# Altium PCB WUT-YJ-4-3-1.PcbDoc (part 5 of 11)
Units mm, origin at the board's own origin, x right, y up, seen from the top; angles counter-clockwise.
Board outline 85 x 56 mm, 4 copper layers (Top Layer, GND_Plane, 3V3_Plane, Bottom Layer); 182 components, 321 nets, 1106 pads, 360 vias.
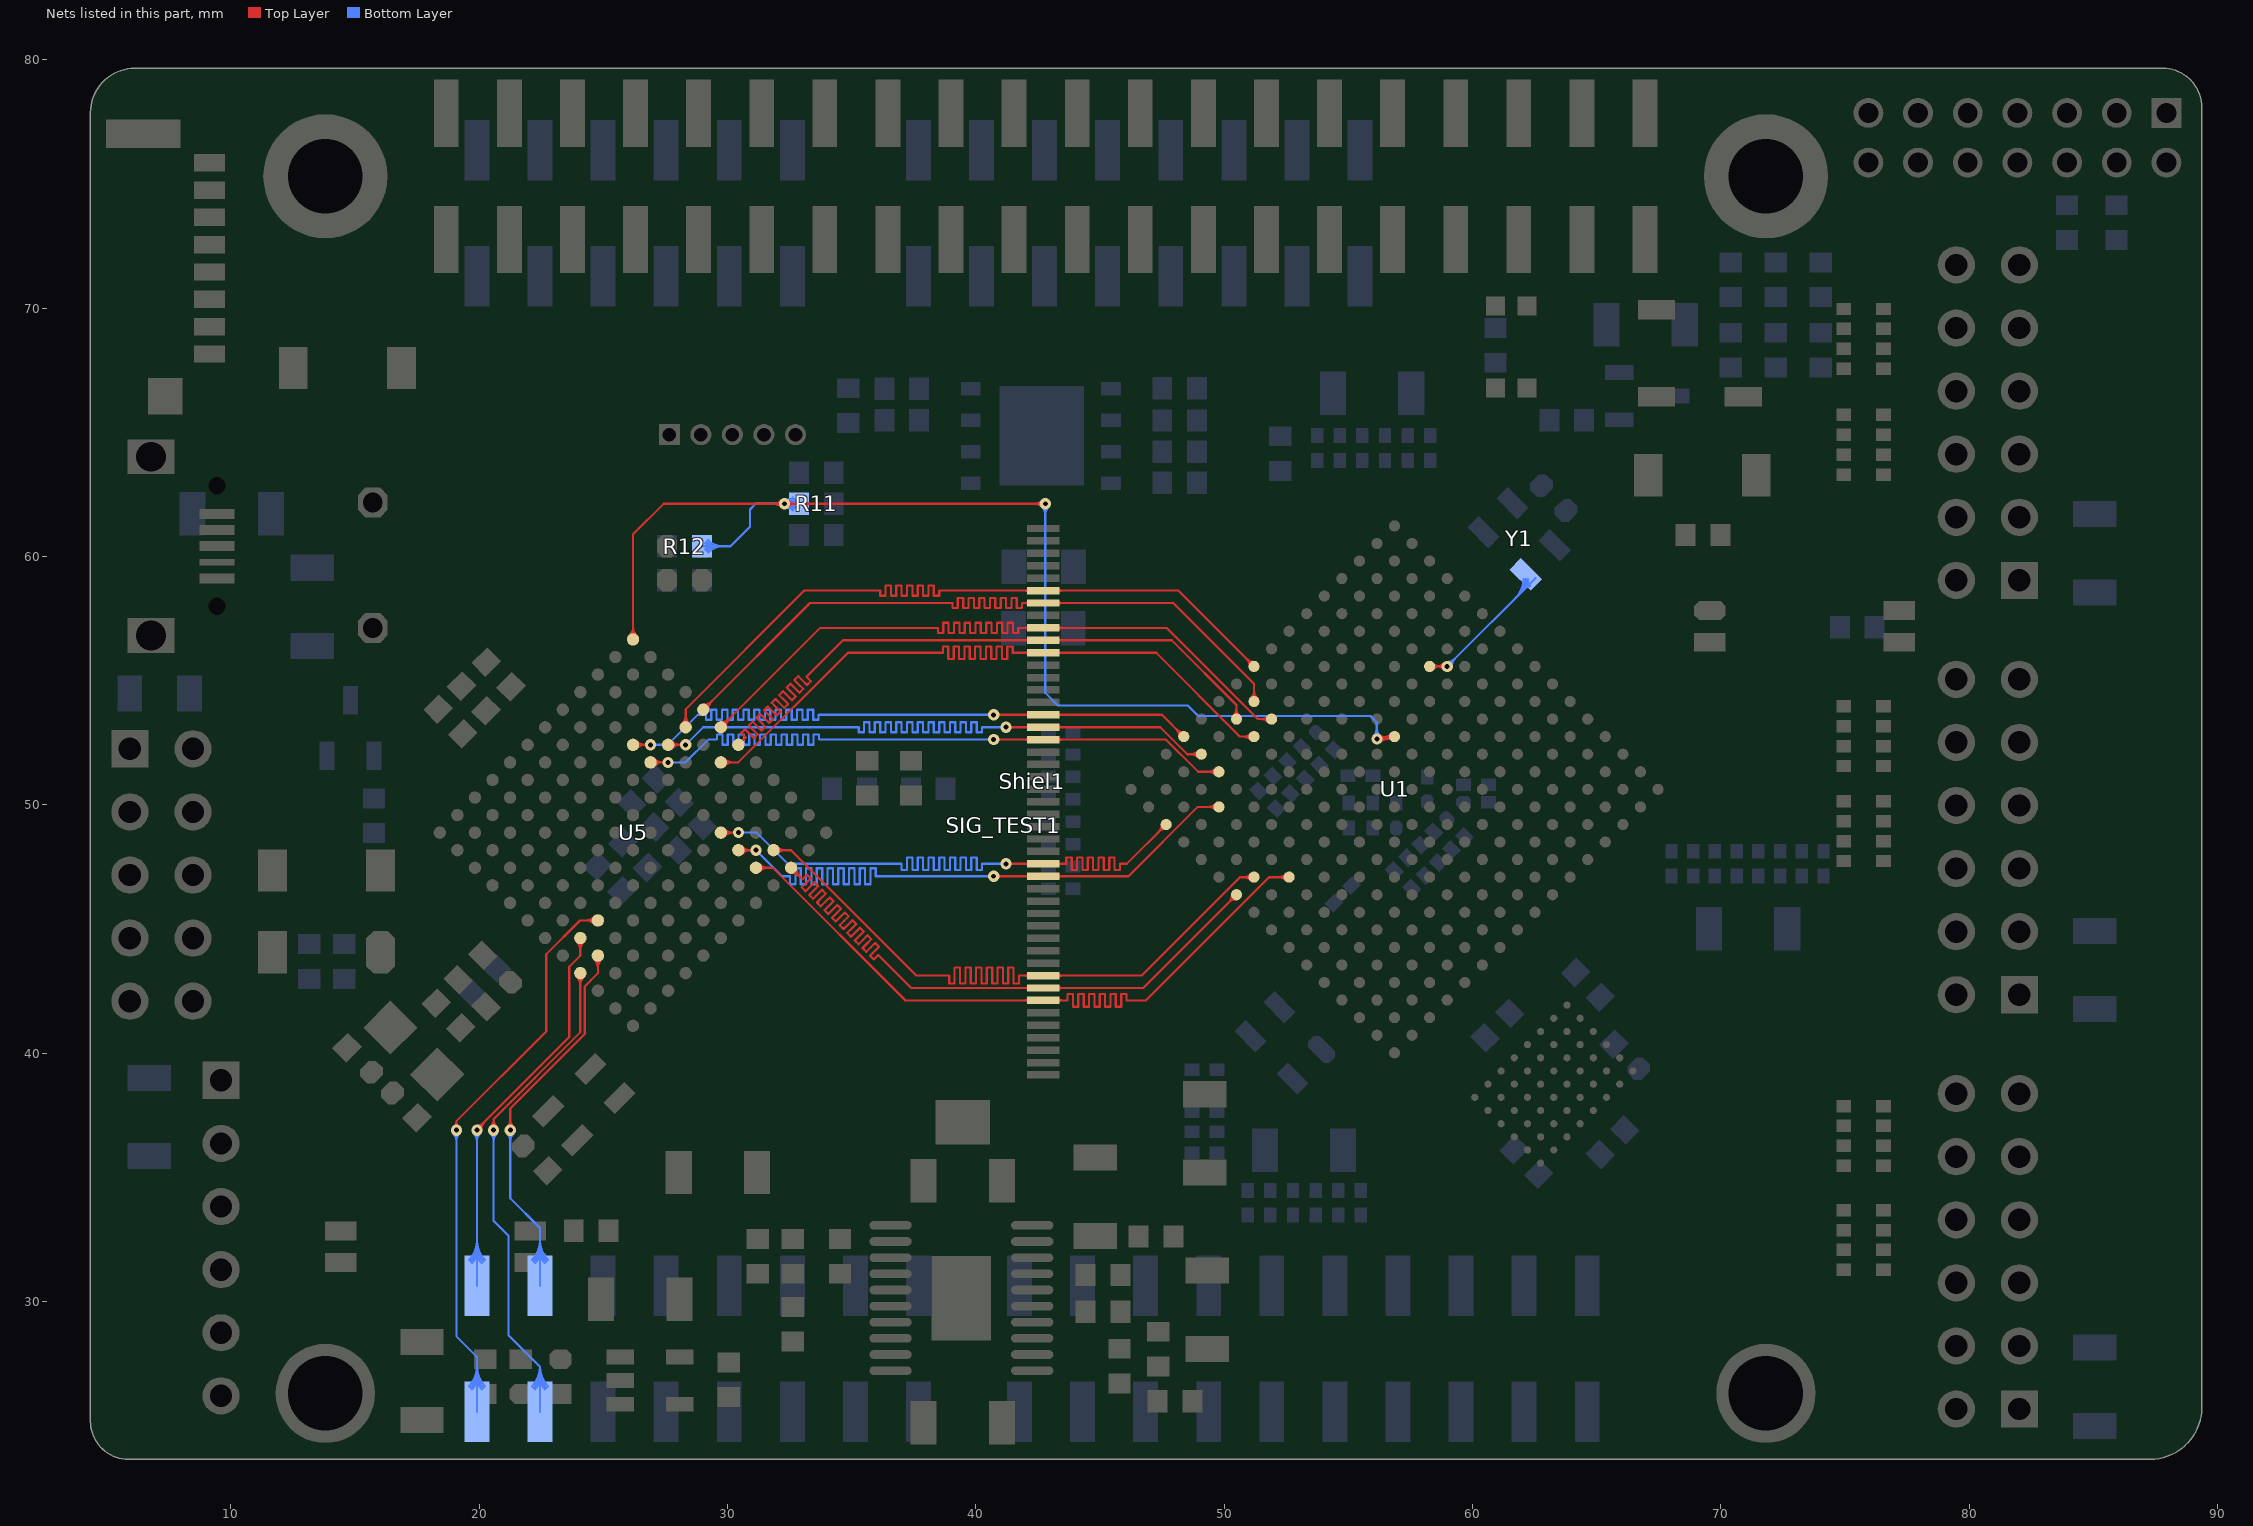
[diagram p7: the nets of this part, all layers, seen from the top]

## Via types
v1: diameter 0.45, hole 0.2, Top Layer to Bottom Layer, tented both sides, 280 vias
v2: diameter 0.61, hole 0.33, Top Layer to Bottom Layer, tented both sides, 40 vias
v3: diameter 0.403, hole 0.2, Top Layer to Bottom Layer, tented both sides, 15 vias
v4: diameter 0.5, hole 0.2, Top Layer to Bottom Layer, tented both sides, 12 vias
v5: diameter 0.864, hole 0.508, Top Layer to Bottom Layer, tented both sides, 11 vias
v6: diameter 0.864, hole 0.381, Top Layer to Bottom Layer, tented both sides, 1 vias
v7: diameter 0.864, hole 0.356, Top Layer to Bottom Layer, tented both sides, 1 vias

## Nets (pads, with @x,y where several pads share a name; then routed paths per layer and width w, separated by ;. In a path a pad name is that pad's centre, name@x,y a point inside that pad or via, vN(x,y) a via of type N, cw(c..) or ccw(c..) an arc to the next point about the centre after c; other vN are vias at no path point) (continued)
FB_AD27: SIG_TEST1.10 U1.F15 U5.A7 | length 33.4
  Top Layer w0.089: U5.A7@30.442,52.422 30.661,52.642 ; U5.A7@30.519,52.613 ccw(c30.569,52.734) 30.661,52.641 ; U5.A7@30.632,52.5 cw(c30.754,52.549) 30.661,52.641 ; SIG_TEST1.10@42.147,56.557 ccw(c41.967,56.377) 41.967,56.631 ccw(c41.967,56.886) SIG_TEST1.10@42.147,56.706 ; SIG_TEST1.10@43.296,56.557 cw(c43.476,56.377) 43.476,56.631 cw(c43.476,56.886) SIG_TEST1.10@43.296,56.706 ; U1.F15@50.367,53.586 ccw(c50.058,53.895) 50.494,53.895 ccw(c50.93,53.895) U1.F15@50.622,53.586 ; U1.F15@50.494,53.459 50.494,54.029 47.891,56.631 SIG_TEST1.10@42.721,56.631 34.651,56.631 33.25,55.231 33.18,55.16 33.36,54.981 33.207,54.828 33.027,55.008 32.848,55.187 32.695,55.035 32.875,54.855 33.054,54.676 32.902,54.523 32.722,54.702 32.542,54.882 32.39,54.729 32.569,54.55 32.749,54.37 32.596,54.218 32.417,54.397 32.237,54.577 32.084,54.424 32.264,54.244 32.444,54.065 32.291,53.912 32.111,54.092 31.932,54.271 31.779,54.119 31.959,53.939 32.138,53.76 31.986,53.607 31.806,53.786 31.626,53.966 31.474,53.813 31.653,53.634 31.833,53.454 31.68,53.302 31.501,53.481 31.321,53.661 31.168,53.508 31.348,53.328 31.528,53.149 31.375,52.996 31.195,53.176 31.016,53.355 30.863,53.203 31.043,53.023 31.222,52.844 31.07,52.691 30.89,52.87 30.71,53.05 30.558,52.897 30.737,52.718 30.661,52.642
FB_AD28: SIG_TEST1.37 U1.B10 U5.C11 | length 34.2
  Top Layer w0.089: U5.C11@31.856,48.18 32.558,48.18 37.606,43.131 38.811,43.131 38.932,43.131 38.932,42.809 39.148,42.809 39.148,43.131 39.148,43.454 39.364,43.454 39.364,43.131 39.364,42.809 39.58,42.809 39.58,43.131 39.58,43.454 39.795,43.454 39.795,43.131 39.795,42.809 40.011,42.809 40.011,43.131 40.011,43.454 40.227,43.454 40.227,43.131 40.227,42.809 40.443,42.809 40.443,43.131 40.443,43.454 40.659,43.454 40.659,43.131 40.659,42.809 40.875,42.809 40.875,43.131 40.875,43.454 41.091,43.454 41.091,43.131 41.091,42.809 41.307,42.809 41.307,43.131 41.307,43.454 41.523,43.454 41.523,43.131 41.523,42.809 41.739,42.809 41.739,43.131 41.846,43.131 SIG_TEST1.37@42.721,43.131 46.677,43.131 50.641,47.095 U1.B10@51.201,47.095 ; U5.C11@31.939,48.097 cw(c32.138,47.898) 32.138,48.18 cw(c32.138,48.461) U5.C11@31.939,48.262 ; U5.C11@32.001,48.034 cw(c32.352,47.683) 32.352,48.18 cw(c32.352,48.676) U5.C11@32.001,48.325 ; SIG_TEST1.37@42.147,43.057 ccw(c41.967,42.877) 41.967,43.131 ccw(c41.967,43.386) SIG_TEST1.37@42.147,43.206 ; SIG_TEST1.37@43.296,43.057 cw(c43.476,42.877) 43.476,43.131 cw(c43.476,43.386) SIG_TEST1.37@43.296,43.206 ; U1.B10@51.074,46.967 ccw(c50.766,46.659) 50.766,47.095 ccw(c50.766,47.531) U1.B10@51.074,47.223
FB_AD29: SIG_TEST1.38 U1.A10 U5.C12 | length 34.4
  Top Layer w0.089: U5.C12@32.563,47.267 cw(c32.563,46.771) 32.914,47.122 cw(c33.265,47.473) U5.C12@32.769,47.473 ; U5.C12@32.563,47.356 cw(c32.563,47.074) 32.762,47.273 cw(c32.961,47.473) U5.C12@32.68,47.473 ; U5.C12@32.563,47.473 32.944,47.092 33.02,47.015 33.2,47.195 33.353,47.042 33.173,46.863 32.993,46.683 33.146,46.531 33.326,46.71 33.505,46.89 33.658,46.737 33.478,46.557 33.299,46.378 33.451,46.225 33.631,46.405 33.811,46.584 33.963,46.432 33.784,46.252 33.604,46.073 33.757,45.92 33.936,46.099 34.116,46.279 34.269,46.126 34.089,45.947 33.909,45.767 34.062,45.615 34.242,45.794 34.421,45.974 34.574,45.821 34.394,45.641 34.215,45.462 34.367,45.309 34.547,45.489 34.727,45.668 34.879,45.516 34.7,45.336 34.52,45.157 34.673,45.004 34.852,45.184 35.032,45.363 35.185,45.21 35.005,45.031 34.825,44.851 34.978,44.699 35.158,44.878 35.337,45.058 35.49,44.905 35.31,44.726 35.131,44.546 35.283,44.393 35.463,44.573 35.643,44.752 35.795,44.6 35.616,44.42 35.436,44.241 35.589,44.088 35.768,44.268 35.948,44.447 36.101,44.294 35.921,44.115 35.741,43.935 35.894,43.783 36.074,43.962 36.144,43.891 37.404,42.631 SIG_TEST1.38@42.721,42.631 46.738,42.631 U1.A10@50.494,46.388 ; SIG_TEST1.38@42.147,42.557 ccw(c41.967,42.377) 41.967,42.631 ccw(c41.967,42.886) SIG_TEST1.38@42.147,42.706 ; SIG_TEST1.38@43.296,42.557 cw(c43.476,42.377) 43.476,42.631 cw(c43.476,42.886) SIG_TEST1.38@43.296,42.706 ; U1.A10@50.314,46.388 cw(c49.878,46.388) 50.186,46.08 cw(c50.494,45.771) U1.A10@50.494,46.207
FB_AD30: SIG_TEST1.28 U1.A14 U5.D9 | length 34.5
  Top Layer w0.089: U5.D9@29.735,48.887 v1(30.442,48.887) ; U5.D9@29.817,48.804 cw(c30.016,48.605) 30.016,48.887 cw(c30.016,49.168) U5.D9@29.817,48.969 ; U5.D9@29.88,48.741 cw(c30.231,48.391) 30.231,48.887 cw(c30.231,49.383) U5.D9@29.88,49.032 ; v1(41.221,47.631) SIG_TEST1.28@42.721,47.631 43.536,47.631 43.644,47.631 43.644,47.885 43.859,47.885 43.859,47.631 43.859,47.377 44.075,47.377 44.075,47.631 44.075,47.885 44.291,47.885 44.291,47.631 44.291,47.377 44.507,47.377 44.507,47.631 44.507,47.885 44.723,47.885 44.723,47.631 44.723,47.377 44.939,47.377 44.939,47.631 44.939,47.885 45.155,47.885 45.155,47.631 45.155,47.377 45.371,47.377 45.371,47.631 45.371,47.885 45.587,47.885 45.587,47.631 45.587,47.377 45.803,47.377 45.803,47.631 45.86,47.631 46.081,47.631 U1.A14@47.666,49.216 ; SIG_TEST1.28@42.147,47.557 ccw(c41.967,47.377) 41.967,47.631 ccw(c41.967,47.886) SIG_TEST1.28@42.147,47.706 ; SIG_TEST1.28@43.296,47.557 cw(c43.476,47.377) 43.476,47.631 cw(c43.476,47.886) SIG_TEST1.28@43.296,47.706 ; U1.A14@47.485,49.216 cw(c47.05,49.216) 47.358,48.908 cw(c47.666,48.6) U1.A14@47.666,49.036
  Bottom Layer w0.089: v1(30.442,48.887) 31.178,48.887 32.433,47.631 36.855,47.631 37.014,47.631 37.014,47.377 37.23,47.377 37.23,47.631 37.23,47.885 37.446,47.885 37.446,47.631 37.446,47.377 37.662,47.377 37.662,47.631 37.662,47.885 37.878,47.885 37.878,47.631 37.878,47.377 38.094,47.377 38.094,47.631 38.094,47.885 38.31,47.885 38.31,47.631 38.31,47.377 38.525,47.377 38.525,47.631 38.525,47.885 38.741,47.885 38.741,47.631 38.741,47.377 38.957,47.377 38.957,47.631 38.957,47.885 39.173,47.885 39.173,47.631 39.173,47.377 39.389,47.377 39.389,47.631 39.389,47.885 39.605,47.885 39.605,47.631 39.605,47.377 39.821,47.377 39.821,47.631 39.821,47.885 40.037,47.885 40.037,47.631 40.037,47.377 40.253,47.377 40.253,47.631 40.361,47.631 v1(41.221,47.631)
FB_AD31: SIG_TEST1.29 U1.C13 U5.D10 | length 34
  Top Layer w0.089: U5.D10@30.442,48.18 v1(31.149,48.18) ; U5.D10@30.524,48.097 cw(c30.724,47.898) 30.724,48.18 cw(c30.724,48.461) U5.D10@30.524,48.262 ; U5.D10@30.587,48.034 cw(c30.938,47.683) 30.938,48.18 cw(c30.938,48.676) U5.D10@30.587,48.325 ; v1(40.721,47.131) SIG_TEST1.29@42.721,47.131 46.15,47.131 48.942,49.923 U1.C13@49.787,49.923 ; SIG_TEST1.29@42.147,47.057 ccw(c41.967,46.877) 41.967,47.131 ccw(c41.967,47.386) SIG_TEST1.29@42.147,47.206 ; SIG_TEST1.29@43.296,47.057 cw(c43.476,46.877) 43.476,47.131 cw(c43.476,47.386) SIG_TEST1.29@43.296,47.206 ; U1.C13@49.66,49.796 ccw(c49.351,49.487) 49.351,49.923 ccw(c49.351,50.359) U1.C13@49.66,50.051
  Bottom Layer w0.089: v1(31.149,48.18) 32.197,47.131 32.305,47.131 32.521,47.131 32.521,46.809 32.737,46.809 32.737,47.131 32.737,47.454 32.953,47.454 32.953,47.131 32.953,46.809 33.169,46.809 33.169,47.131 33.169,47.454 33.385,47.454 33.385,47.131 33.385,46.809 33.601,46.809 33.601,47.131 33.601,47.454 33.817,47.454 33.817,47.131 33.817,46.809 34.032,46.809 34.032,47.131 34.032,47.454 34.248,47.454 34.248,47.131 34.248,46.809 34.464,46.809 34.464,47.131 34.464,47.454 34.68,47.454 34.68,47.131 34.68,46.809 34.896,46.809 34.896,47.131 34.896,47.454 35.112,47.454 35.112,47.131 35.112,46.809 35.328,46.809 35.328,47.131 35.328,47.454 35.544,47.454 35.544,47.131 35.544,46.809 35.76,46.809 35.76,47.131 35.76,47.454 35.976,47.454 35.976,47.131 36.017,47.131 v1(40.721,47.131)
FB_ALE: SIG_TEST1.7 U1.G15 U5.A5 | length 34
  Top Layer w0.089: U5.A5@29.028,53.837 33.323,58.131 38.989,58.131 39.059,58.131 39.059,57.928 39.275,57.928 39.275,58.131 39.275,58.335 39.491,58.335 39.491,58.131 39.491,57.928 39.707,57.928 39.707,58.131 39.707,58.335 39.922,58.335 39.922,58.131 39.922,57.928 40.138,57.928 40.138,58.131 40.138,58.335 40.354,58.335 40.354,58.131 40.354,57.928 40.57,57.928 40.57,58.131 40.57,58.335 40.786,58.335 40.786,58.131 40.786,57.928 41.002,57.928 41.002,58.131 41.002,58.335 41.218,58.335 41.218,58.131 41.218,57.928 41.434,57.928 41.434,58.131 41.434,58.335 41.65,58.335 41.65,58.131 41.65,57.928 41.866,57.928 41.866,58.131 41.974,58.131 ; U5.A5@29.028,53.953 ccw(c29.028,54.235) 29.227,54.036 ccw(c29.426,53.837) U5.A5@29.144,53.837 ; U5.A5@29.028,54.042 ccw(c29.028,54.538) 29.379,54.187 ccw(c29.729,53.837) U5.A5@29.233,53.837 ; SIG_TEST1.7@42.145,58.058 ccw(c41.974,57.893) 41.974,58.131 ; SIG_TEST1.7@42.145,58.205 cw(c41.974,58.37) 41.974,58.131 ; SIG_TEST1.7@43.296,58.057 cw(c43.476,57.877) 43.476,58.131 cw(c43.476,58.386) SIG_TEST1.7@43.296,58.206 ; U1.G15@51.074,54.294 ccw(c50.766,54.602) 51.201,54.602 ccw(c51.637,54.602) U1.G15@51.329,54.294 ; U1.G15@51.201,54.166 51.201,54.882 47.952,58.131 SIG_TEST1.7@42.721,58.131 41.974,58.131
FB_BE7_0: SIG_TEST1.6 U1.H16 U5.B5 | length 34
  Top Layer w0.089: U5.B5@28.175,53.275 ccw(c27.824,53.626) 28.321,53.626 ccw(c28.817,53.626) U5.B5@28.466,53.275 ; U5.B5@28.238,53.212 ccw(c28.039,53.411) 28.321,53.411 ccw(c28.602,53.411) U5.B5@28.403,53.212 ; U5.B5@28.321,53.129 28.321,53.853 33.099,58.631 36.017,58.631 36.151,58.631 36.151,58.428 36.366,58.428 36.366,58.631 36.366,58.835 36.582,58.835 36.582,58.631 36.582,58.428 36.798,58.428 36.798,58.631 36.798,58.835 37.014,58.835 37.014,58.631 37.014,58.428 37.23,58.428 37.23,58.631 37.23,58.835 37.446,58.835 37.446,58.631 37.446,58.428 37.662,58.428 37.662,58.631 37.662,58.835 37.878,58.835 37.878,58.631 37.878,58.428 38.094,58.428 38.094,58.631 38.094,58.835 38.31,58.835 38.31,58.631 38.31,58.428 38.525,58.428 38.525,58.631 38.633,58.631 SIG_TEST1.6@42.721,58.631 48.15,58.631 U1.H16@51.201,55.58 ; SIG_TEST1.6@42.147,58.557 ccw(c41.967,58.377) 41.967,58.631 ccw(c41.967,58.886) SIG_TEST1.6@42.147,58.706 ; SIG_TEST1.6@43.296,58.557 cw(c43.476,58.377) 43.476,58.631 cw(c43.476,58.886) SIG_TEST1.6@43.296,58.706 ; U1.H16@51.021,55.58 ccw(c50.585,55.58) 50.893,55.888 ccw(c51.201,56.197) U1.H16@51.201,55.761
FB_BE15_8: SIG_TEST1.17 U1.D15 U5.C5 | length 34.3
  Top Layer w0.089: U5.C5@27.613,52.422 v1(28.321,52.422) ; U5.C5@27.696,52.34 cw(c27.895,52.141) 27.895,52.422 cw(c27.895,52.704) U5.C5@27.696,52.505 ; U5.C5@27.759,52.277 cw(c28.11,51.926) 28.11,52.422 cw(c28.11,52.919) U5.C5@27.759,52.568 ; v1(41.221,53.131) SIG_TEST1.17@42.721,53.131 47.423,53.131 48.51,52.045 U1.D15@49.08,52.045 ; SIG_TEST1.17@42.147,53.057 ccw(c41.967,52.877) 41.967,53.131 ccw(c41.967,53.386) SIG_TEST1.17@42.147,53.206 ; SIG_TEST1.17@43.296,53.057 cw(c43.476,52.877) 43.476,53.131 cw(c43.476,53.386) SIG_TEST1.17@43.296,53.206 ; U1.D15@48.952,51.917 ccw(c48.644,51.609) 48.644,52.045 ccw(c48.644,52.48) U1.D15@48.952,52.172
  Bottom Layer w0.089: v1(28.321,52.422) 29.03,53.131 35.115,53.131 35.287,53.131 35.287,52.928 35.503,52.928 35.503,53.131 35.503,53.335 35.719,53.335 35.719,53.131 35.719,52.928 35.935,52.928 35.935,53.131 35.935,53.335 36.151,53.335 36.151,53.131 36.151,52.928 36.366,52.928 36.366,53.131 36.366,53.335 36.582,53.335 36.582,53.131 36.582,52.928 36.798,52.928 36.798,53.131 36.798,53.335 37.014,53.335 37.014,53.131 37.014,52.928 37.23,52.928 37.23,53.131 37.23,53.335 37.446,53.335 37.446,53.131 37.446,52.928 37.662,52.928 37.662,53.131 37.662,53.335 37.878,53.335 37.878,53.131 37.878,52.928 38.094,52.928 38.094,53.131 38.094,53.335 38.31,53.335 38.31,53.131 38.31,52.928 38.525,52.928 38.525,53.131 38.525,53.335 38.741,53.335 38.741,53.131 38.741,52.928 38.957,52.928 38.957,53.131 38.957,53.335 39.173,53.335 39.173,53.131 39.173,52.928 39.389,52.928 39.389,53.131 39.389,53.335 39.605,53.335 39.605,53.131 39.605,52.928 39.821,52.928 39.821,53.131 39.821,53.335 40.037,53.335 40.037,53.131 40.037,52.928 40.253,52.928 40.253,53.131 40.361,53.131 v1(41.221,53.131)
FB_BE23_16: SIG_TEST1.9 U1.G14 U5.A6 | length 34.2
  Top Layer w0.089: U5.A6@29.735,53.129 33.737,57.131 38.405,57.131 38.475,57.131 38.475,56.928 38.691,56.928 38.691,57.131 38.691,57.335 38.906,57.335 38.906,57.131 38.906,56.928 39.122,56.928 39.122,57.131 39.122,57.335 39.338,57.335 39.338,57.131 39.338,56.928 39.554,56.928 39.554,57.131 39.554,57.335 39.77,57.335 39.77,57.131 39.77,56.928 39.986,56.928 39.986,57.131 39.986,57.335 40.202,57.335 40.202,57.131 40.202,56.928 40.418,56.928 40.418,57.131 40.418,57.335 40.634,57.335 40.634,57.131 40.634,56.928 40.85,56.928 40.85,57.131 40.85,57.335 41.065,57.335 41.065,57.131 41.065,56.928 41.281,56.928 41.281,57.131 41.281,57.335 41.497,57.335 41.497,57.131 41.497,56.928 41.713,56.928 41.713,57.131 41.821,57.131 SIG_TEST1.9@42.721,57.131 47.675,57.131 51.348,53.459 U1.G14@51.909,53.459 ; U5.A6@29.735,53.246 ccw(c29.735,53.528) 29.934,53.329 ccw(c30.133,53.129) U5.A6@29.851,53.129 ; U5.A6@29.735,53.335 ccw(c29.735,53.831) 30.086,53.48 ccw(c30.437,53.129) U5.A6@29.94,53.129 ; SIG_TEST1.9@42.147,57.057 ccw(c41.967,56.877) 41.967,57.131 ccw(c41.967,57.386) SIG_TEST1.9@42.147,57.206 ; SIG_TEST1.9@43.296,57.057 cw(c43.476,56.877) 43.476,57.131 cw(c43.476,57.386) SIG_TEST1.9@43.296,57.206 ; U1.G14@51.781,53.331 ccw(c51.473,53.023) 51.473,53.459 ccw(c51.473,53.895) U1.G14@51.781,53.586
FB_BE31_24: SIG_TEST1.18 U1.D14 U5.D5 | length 34.2
  Top Layer w0.089: U5.D5@26.906,51.715 v1(27.613,51.715) ; U5.D5@26.989,51.633 cw(c27.188,51.434) 27.188,51.715 cw(c27.188,51.997) U5.D5@26.989,51.798 ; U5.D5@27.052,51.57 cw(c27.403,51.219) 27.403,51.715 cw(c27.403,52.211) U5.D5@27.052,51.861 ; v1(40.721,52.631) SIG_TEST1.18@42.721,52.631 47.657,52.631 48.951,51.337 U1.D14@49.787,51.337 ; SIG_TEST1.18@42.147,52.557 ccw(c41.967,52.377) 41.967,52.631 ccw(c41.967,52.886) SIG_TEST1.18@42.147,52.706 ; SIG_TEST1.18@43.296,52.557 cw(c43.476,52.377) 43.476,52.631 cw(c43.476,52.886) SIG_TEST1.18@43.296,52.706 ; U1.D14@49.66,51.21 ccw(c49.351,50.902) 49.351,51.337 ccw(c49.351,51.773) U1.D14@49.66,51.465
  Bottom Layer w0.089: v1(27.613,51.715) 28.316,51.715 29.233,52.631 29.477,52.631 29.585,52.631 29.585,52.835 29.801,52.835 29.801,52.631 29.801,52.428 30.016,52.428 30.016,52.631 30.016,52.835 30.232,52.835 30.232,52.631 30.232,52.428 30.448,52.428 30.448,52.631 30.448,52.835 30.664,52.835 30.664,52.631 30.664,52.428 30.88,52.428 30.88,52.631 30.88,52.835 31.096,52.835 31.096,52.631 31.096,52.428 31.312,52.428 31.312,52.631 31.312,52.835 31.528,52.835 31.528,52.631 31.528,52.428 31.744,52.428 31.744,52.631 31.744,52.835 31.96,52.835 31.96,52.631 31.96,52.428 32.175,52.428 32.175,52.631 32.175,52.835 32.391,52.835 32.391,52.631 32.391,52.428 32.607,52.428 32.607,52.631 32.607,52.835 32.823,52.835 32.823,52.631 32.823,52.428 33.039,52.428 33.039,52.631 33.039,52.835 33.255,52.835 33.255,52.631 33.255,52.428 33.471,52.428 33.471,52.631 33.471,52.835 33.687,52.835 33.687,52.631 33.795,52.631 v1(40.721,52.631)
FB_CS0: SIG_TEST1.16 U1.D16 U5.D4 | length 34.3
  Top Layer w0.089: U5.D4@26.199,52.422 v1(26.906,52.422) ; U5.D4@26.282,52.34 cw(c26.481,52.141) 26.481,52.422 cw(c26.481,52.704) U5.D4@26.282,52.505 ; U5.D4@26.345,52.277 cw(c26.695,51.926) 26.695,52.422 cw(c26.695,52.919) U5.D4@26.345,52.568 ; v1(40.721,53.631) 47.493,53.631 U1.D16@48.373,52.752 ; SIG_TEST1.16@42.147,53.557 ccw(c41.967,53.377) 41.967,53.631 ccw(c41.967,53.886) SIG_TEST1.16@42.147,53.706 ; SIG_TEST1.16@43.296,53.557 cw(c43.476,53.377) 43.476,53.631 cw(c43.476,53.886) SIG_TEST1.16@43.296,53.706 ; U1.D16@48.192,52.752 ccw(c47.757,52.752) 48.065,53.06 ccw(c48.373,53.368) U1.D16@48.373,52.932
  Bottom Layer w0.089: v1(26.906,52.422) 27.601,52.422 28.81,53.631 28.918,53.631 29.134,53.631 29.134,53.428 29.35,53.428 29.35,53.631 29.35,53.835 29.566,53.835 29.566,53.631 29.566,53.428 29.782,53.428 29.782,53.631 29.782,53.835 29.998,53.835 29.998,53.631 29.998,53.428 30.214,53.428 30.214,53.631 30.214,53.835 30.43,53.835 30.43,53.631 30.43,53.428 30.645,53.428 30.645,53.631 30.645,53.835 30.861,53.835 30.861,53.631 30.861,53.428 31.077,53.428 31.077,53.631 31.077,53.835 31.293,53.835 31.293,53.631 31.293,53.428 31.509,53.428 31.509,53.631 31.509,53.835 31.725,53.835 31.725,53.631 31.725,53.428 31.941,53.428 31.941,53.631 31.941,53.835 32.157,53.835 32.157,53.631 32.157,53.428 32.373,53.428 32.373,53.631 32.373,53.835 32.589,53.835 32.589,53.631 32.589,53.428 32.804,53.428 32.804,53.631 32.804,53.835 33.02,53.835 33.02,53.631 33.02,53.428 33.236,53.428 33.236,53.631 33.236,53.835 33.452,53.835 33.452,53.631 33.452,53.428 33.668,53.428 33.668,53.631 33.82,53.631 v1(40.721,53.631)
FB_OE: SIG_TEST1.39 U1.C9 U5.D11 | length 34
  Top Layer w0.089: U5.D11@31.149,47.473 31.83,47.473 37.171,42.131 SIG_TEST1.39@42.721,42.131 43.586,42.131 43.694,42.131 43.694,42.385 43.91,42.385 43.91,42.131 43.91,41.877 44.126,41.877 44.126,42.131 44.126,42.385 44.342,42.385 44.342,42.131 44.342,41.877 44.558,41.877 44.558,42.131 44.558,42.385 44.774,42.385 44.774,42.131 44.774,41.877 44.99,41.877 44.99,42.131 44.99,42.385 45.206,42.385 45.206,42.131 45.206,41.877 45.422,41.877 45.422,42.131 45.422,42.385 45.637,42.385 45.637,42.131 45.637,41.877 45.853,41.877 45.853,42.131 45.853,42.385 46.069,42.385 46.069,42.131 46.076,42.131 46.84,42.131 51.804,47.095 U1.C9@52.616,47.095 ; U5.D11@31.231,47.39 cw(c31.431,47.191) 31.431,47.473 cw(c31.431,47.754) U5.D11@31.231,47.555 ; U5.D11@31.294,47.327 cw(c31.645,46.976) 31.645,47.473 cw(c31.645,47.969) U5.D11@31.294,47.618 ; SIG_TEST1.39@42.147,42.057 ccw(c41.967,41.877) 41.967,42.131 ccw(c41.967,42.386) SIG_TEST1.39@42.147,42.206 ; SIG_TEST1.39@43.296,42.057 cw(c43.476,41.877) 43.476,42.131 cw(c43.476,42.386) SIG_TEST1.39@43.296,42.206 ; U1.C9@52.488,46.967 ccw(c52.18,46.659) 52.18,47.095 ccw(c52.18,47.531) U1.C9@52.488,47.223
FB_RW: SIG_TEST1.11 U1.F14 U5.B7 | length 34
  Top Layer w0.089: U5.B7@29.735,51.715 30.437,51.715 34.854,56.131 38.57,56.131 38.678,56.131 38.678,56.385 38.894,56.385 38.894,56.131 38.894,55.877 39.11,55.877 39.11,56.131 39.11,56.385 39.326,56.385 39.326,56.131 39.326,55.877 39.541,55.877 39.541,56.131 39.541,56.385 39.757,56.385 39.757,56.131 39.757,55.877 39.973,55.877 39.973,56.131 39.973,56.385 40.189,56.385 40.189,56.131 40.189,55.877 40.405,55.877 40.405,56.131 40.405,56.385 40.621,56.385 40.621,56.131 40.621,55.877 40.837,55.877 40.837,56.131 40.837,56.385 41.053,56.385 41.053,56.131 41.053,55.877 41.269,55.877 41.269,56.131 41.269,56.385 41.485,56.385 41.485,56.131 41.656,56.131 SIG_TEST1.11@42.721,56.131 47.261,56.131 50.641,52.752 U1.F14@51.201,52.752 ; U5.B7@29.817,51.633 cw(c30.016,51.434) 30.016,51.715 cw(c30.016,51.997) U5.B7@29.817,51.798 ; U5.B7@29.88,51.57 cw(c30.231,51.219) 30.231,51.715 cw(c30.231,52.211) U5.B7@29.88,51.861 ; SIG_TEST1.11@42.147,56.057 ccw(c41.967,55.877) 41.967,56.131 ccw(c41.967,56.386) SIG_TEST1.11@42.147,56.206 ; SIG_TEST1.11@43.296,56.057 cw(c43.476,55.877) 43.476,56.131 cw(c43.476,56.386) SIG_TEST1.11@43.296,56.206 ; U1.F14@51.074,52.624 ccw(c50.766,52.316) 50.766,52.752 ccw(c50.766,53.188) U1.F14@51.074,52.879
FPGA_INIT: R11.1 R12.2 U1.K10 U5.A1 | length 67.1
  Top Layer w0.089: U5.A1@26.054,56.81 ccw(c25.703,57.161) 26.199,57.161 ccw(c26.695,57.161) U5.A1@26.345,56.81 ; U5.A1@26.117,56.747 ccw(c25.918,56.947) 26.199,56.947 ccw(c26.481,56.947) U5.A1@26.282,56.747 ; U5.A1@26.199,56.665 26.199,60.896 27.432,62.128 v1(32.296,62.128) v1(42.799,62.128) ; v1@32.168,62.001 ccw(c31.86,61.693) 31.86,62.128 ccw(c31.86,62.564) v1@32.168,62.256 ; v1@32.424,62.001 cw(c32.732,61.693) 32.732,62.128 cw(c32.732,62.564) v1@32.424,62.256 ; v1@42.671,62.001 ccw(c42.363,61.693) 42.363,62.128 ccw(c42.363,62.564) v1@42.671,62.256 ; v1@56.151,52.752 56.147,52.747 v1(56.147,52.654) 56.761,52.654 U1.K10@56.858,52.752 ; v1@56.187,52.654 ccw(c56.187,53.423) U1.K10@56.731,52.879 ; v1@56.248,52.804 ccw(c56.457,53.114) 56.554,52.753 ; v1@56.274,52.527 cw(c56.583,52.218) 56.583,52.654 cw(c56.583,53.09) v1@56.274,52.782 ; v1@56.303,52.564 cw(c56.65,52.364) 56.546,52.75 ; 56.402,52.654 ccw(c56.402,53.208) U1.K10@56.794,52.817 ; 56.616,52.654 ccw(c56.616,52.994) U1.K10@56.856,52.754
  Bottom Layer w0.089: R12.2@28.97,60.414 30.124,60.414 30.912,61.201 30.912,61.9 31.14,62.128 R11.1@32.879,62.128 ; R12.2@29.096,60.288 cw(c29.399,59.985) 29.399,60.414 cw(c29.399,60.843) R12.2@29.096,60.54 ; R12.2@29.159,60.225 cw(c29.614,59.77) 29.614,60.414 cw(c29.614,61.058) R12.2@29.159,60.602 ; R12.2@29.222,60.162 cw(c29.829,59.556) 29.829,60.414 cw(c29.829,61.272) R12.2@29.222,60.665 ; 32.005,62.128 cw(c32.005,61.248) R11.1@32.627,61.871 ; 32.036,62.128 ccw(c32.036,62.965) R11.1@32.627,62.373 ; v1@32.168,62.001 ccw(c31.86,61.693) 31.86,62.128 ccw(c31.86,62.564) v1@32.168,62.256 ; v1@32.22,62.128 cw(c32.22,61.463) R11.1@32.69,61.933 ; v1@32.25,62.128 ccw(c32.25,62.75) R11.1@32.69,62.311 ; v1@32.335,61.952 cw(c32.4,61.657) R11.1@32.563,61.912 ; v1@32.337,62.304 ccw(c32.41,62.621) R11.1@32.582,62.345 ; v1@32.387,62.12 cw(c32.606,62.101) R11.1@32.49,62.288 ; v1@32.388,62.135 ccw(c32.618,62.151) R11.1@32.494,61.956 ; v1@32.414,61.991 cw(c32.537,61.848) 32.586,62.03 cw(c32.625,62.177) v1@32.475,62.155 ; v1@32.421,62.258 ccw(c32.538,62.379) 32.581,62.217 ccw(c32.619,62.075) v1@32.474,62.099 ; v1@32.424,62.001 cw(c32.732,61.693) 32.732,62.128 cw(c32.732,62.564) v1@32.424,62.256 ; v1@32.434,62.128 cw(c32.434,61.678) R11.1@32.753,61.996 ; v1@32.445,62.027 cw(c32.563,61.946) 32.6,62.084 cw(c32.655,62.29) v1@32.461,62.202 ; v1@32.451,62.222 ccw(c32.562,62.289) 32.596,62.163 ccw(c32.651,61.958) v1@32.459,62.05 ; v1@32.465,62.128 ccw(c32.465,62.536) R11.1@32.753,62.248 ; v1@32.476,62.113 cw(c32.828,62.082) R11.1@32.641,62.382 ; v1@32.476,62.141 ccw(c32.838,62.166) R11.1@32.643,61.861 ; v1@42.671,62.001 cw(c42.363,61.693) 42.799,61.693 cw(c43.235,61.693) v1@42.927,62.001 ; v1(42.799,62.128) 42.799,54.514 43.313,54 48.539,54 48.959,53.581 55.893,53.581 56.147,53.327 v1(56.147,52.654) ; v1@56.019,52.782 ccw(c55.711,53.09) 56.147,53.09 ccw(c56.583,53.09) v1@56.274,52.782 ; v1@56.147,52.747 v1@56.151,52.752
FTM1_QDA: Shiel1.29 U5.K8 | length 29.5
  Top Layer w0.089: v1@18.982,37.052 ccw(c18.828,37.262) 19.088,37.262 ; v1(19.088,36.906) 19.088,37.262 ; v1@19.195,37.052 cw(c19.348,37.262) 19.088,37.262 ; U5.K8@24.64,45.206 ccw(c24.289,44.855) 24.289,45.351 ccw(c24.289,45.848) U5.K8@24.64,45.497 ; U5.K8@24.703,45.269 ccw(c24.503,45.07) 24.503,45.351 ccw(c24.503,45.633) U5.K8@24.703,45.434 ; U5.K8@24.785,45.351 24.066,45.351 22.708,43.993 22.708,40.881 19.088,37.262
  Bottom Layer w0.089: v1@18.96,36.779 cw(c18.652,36.47) 19.088,36.47 cw(c19.524,36.47) v1@19.216,36.779 ; v1@19.088,36.932 19.088,28.613 19.914,27.788 Shiel1.29@19.914,25.565 ; Shiel1.29@19.591,26.602 ccw(c18.814,27.38) 19.914,27.38 ccw(c21.013,27.38) Shiel1.29@20.236,26.602 ; Shiel1.29@19.654,26.539 ccw(c19.028,27.165) 19.914,27.165 ccw(c20.799,27.165) Shiel1.29@20.173,26.539 ; Shiel1.29@19.717,26.476 ccw(c19.243,26.951) 19.914,26.951 ccw(c20.584,26.951) Shiel1.29@20.11,26.476
FTM1_QDB: Shiel1.30 U5.L8 | length 22.7
  Top Layer w0.089: v1@19.901,36.919 19.901,36.926 23.635,40.66 23.635,43.485 24.078,43.928 U5.L8@24.078,44.644 ; v1@19.914,37.087 ccw(c19.914,37.443) 20.165,37.191 ; v1@20.005,36.906 cw(c20.306,36.906) 20.093,37.119 ; v1@20.094,36.906 cw(c20.61,36.906) 20.245,37.271 ; U5.L8@23.933,44.499 cw(c23.582,44.148) 24.078,44.148 cw(c24.574,44.148) U5.L8@24.223,44.499 ; U5.L8@23.995,44.562 cw(c23.796,44.363) 24.078,44.363 cw(c24.36,44.363) U5.L8@24.16,44.562
  Bottom Layer w0.089: Shiel1.30@19.591,31.682 ccw(c18.814,32.46) 19.914,32.46 ccw(c21.013,32.46) Shiel1.30@20.236,31.682 ; Shiel1.30@19.654,31.619 ccw(c19.028,32.245) 19.914,32.245 ccw(c20.799,32.245) Shiel1.30@20.173,31.619 ; Shiel1.30@19.717,31.556 ccw(c19.243,32.031) 19.914,32.031 ccw(c20.584,32.031) Shiel1.30@20.11,31.556 ; v1@19.786,36.779 cw(c19.478,36.47) 19.914,36.47 cw(c20.35,36.47) v1@20.041,36.779 ; Shiel1.30@19.914,30.645 v1(19.914,36.906)
FTM2_QDA: Shiel1.31 U5.M9 | length 26.7
  Top Layer w0.089: v1@20.459,37.034 ccw(c20.151,37.342) 20.587,37.342 ccw(c21.023,37.342) v1@20.714,37.034 ; v1(20.587,36.906) 20.587,37.361 24.078,40.852 U5.M9@24.078,43.23 ; U5.M9@23.933,43.085 cw(c23.582,42.734) 24.078,42.734 cw(c24.574,42.734) U5.M9@24.223,43.085 ; U5.M9@23.995,43.147 cw(c23.796,42.948) 24.078,42.948 cw(c24.36,42.948) U5.M9@24.16,43.147
  Bottom Layer w0.089: v1@20.459,36.779 cw(c20.151,36.47) 20.587,36.47 cw(c21.023,36.47) v1@20.714,36.779 ; v1@20.587,36.932 20.587,33.249 21.184,32.652 21.184,28.651 22.454,27.381 Shiel1.31@22.454,25.565 ; Shiel1.31@22.131,26.602 ccw(c21.354,27.38) 22.454,27.38 ccw(c23.553,27.38) Shiel1.31@22.776,26.602 ; Shiel1.31@22.194,26.539 ccw(c21.568,27.165) 22.454,27.165 ccw(c23.339,27.165) Shiel1.31@22.713,26.539 ; Shiel1.31@22.257,26.476 ccw(c21.783,26.951) 22.454,26.951 ccw(c23.124,26.951) Shiel1.31@22.65,26.476
FTM2_QDB: Shiel1.32 U5.L9 | length 22
  Top Layer w0.089: v1@21.132,37.034 ccw(c20.824,37.342) 21.26,37.342 ccw(c21.696,37.342) v1@21.387,37.034 ; v1(21.26,36.906) 21.26,37.782 24.256,40.778 24.256,42.696 24.785,43.225 U5.L9@24.785,43.937 ; U5.L9@24.64,43.792 cw(c24.289,43.441) 24.785,43.441 cw(c25.281,43.441) U5.L9@24.93,43.792 ; U5.L9@24.703,43.855 cw(c24.503,43.655) 24.785,43.655 cw(c25.067,43.655) U5.L9@24.868,43.855
  Bottom Layer w0.089: v1@21.132,36.779 cw(c20.824,36.47) 21.26,36.47 cw(c21.696,36.47) v1@21.387,36.779 ; v1@21.26,36.932 21.26,34.163 22.454,32.969 Shiel1.32@22.454,30.645 ; Shiel1.32@22.131,31.682 ccw(c21.354,32.46) 22.454,32.46 ccw(c23.553,32.46) Shiel1.32@22.776,31.682 ; Shiel1.32@22.194,31.619 ccw(c21.568,32.245) 22.454,32.245 ccw(c23.339,32.245) Shiel1.32@22.713,31.619 ; Shiel1.32@22.257,31.556 ccw(c21.783,32.031) 22.454,32.031 ccw(c23.124,32.031) Shiel1.32@22.65,31.556
GCLK: U1.N11 Y1.3 | length 10
  Top Layer w0.089: U1.N11@58.273,55.58 v1(58.98,55.58) ; U1.N11@58.4,55.452 cw(c58.708,55.144) 58.708,55.58 cw(c58.708,56.016) U1.N11@58.4,55.708 ; v1@58.852,55.452 ccw(c58.544,55.144) 58.544,55.58 ccw(c58.544,56.016) v1@58.852,55.708
  Bottom Layer w0.089: v1(58.98,55.58) 62.522,59.123 Y1.3@62.522,59.144 ; v1@58.98,55.761 ccw(c58.98,56.197) 59.288,55.888 ccw(c59.596,55.58) v1@59.16,55.58 ; 61.742,58.343 ccw(c60.992,59.092) Y1.3@62.053,59.092 ; 61.894,58.494 ccw(c61.296,59.092) Y1.3@62.142,59.092 ; 62.046,58.646 ccw(c61.599,59.092) Y1.3@62.23,59.092 ; 62.125,58.725 cw(c62.333,58.517) Y1.3@62.333,58.812